# Altium PCB granite.PcbDoc
Units mm, origin at the board's own origin, x right, y up, seen from the top; angles counter-clockwise.
Board outline 40 x 40 mm, 2 copper layers (Top Layer, Bottom Layer), stack 1.271 mm thick; 53 components, 35 nets, 188 pads, 99 vias.
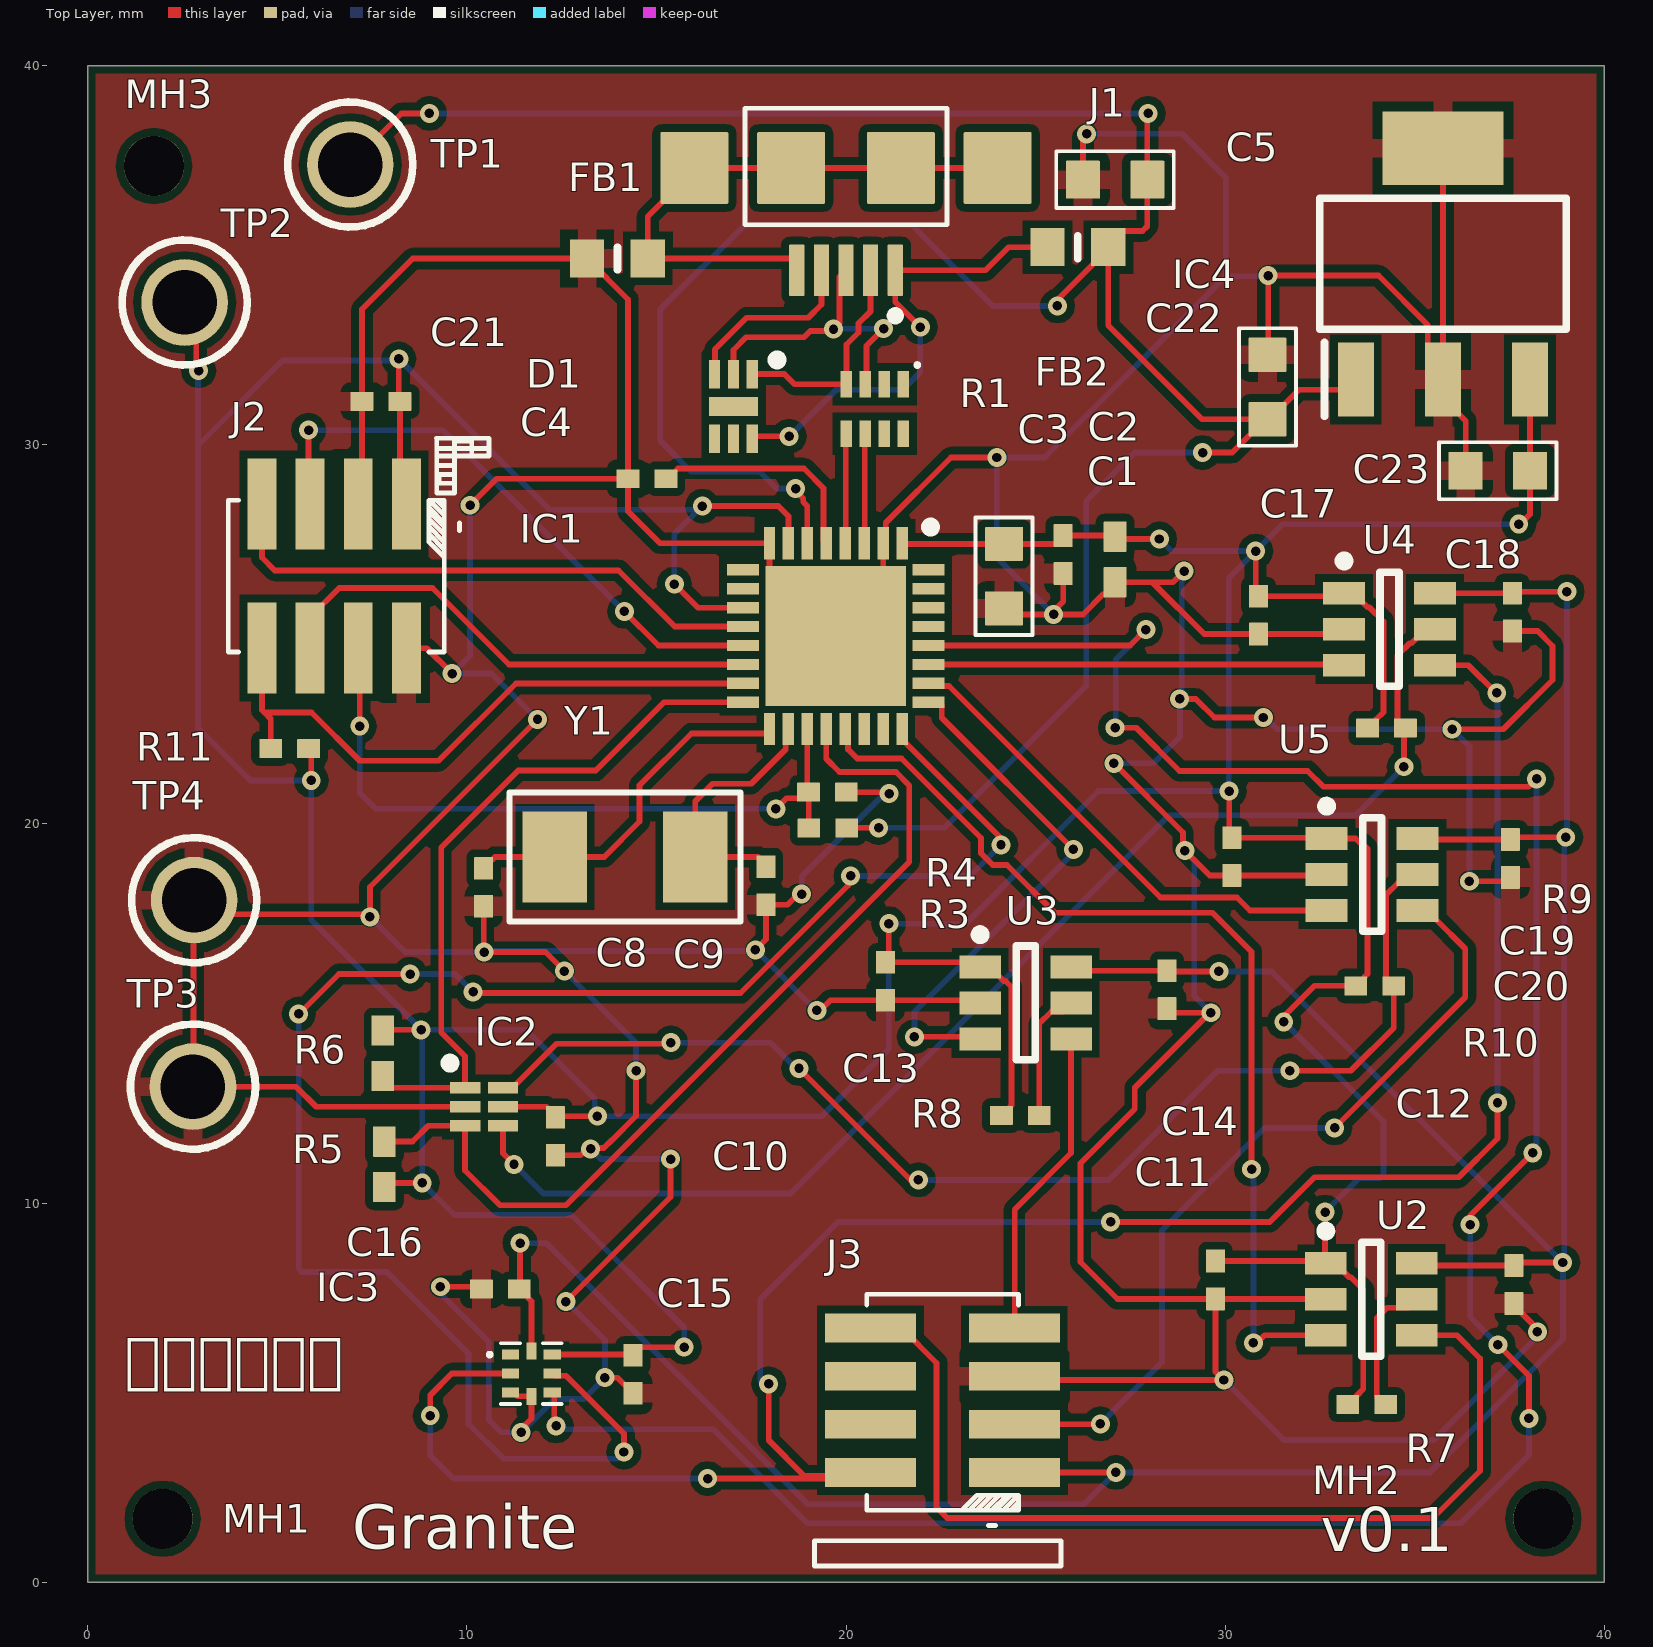
[diagram p0: Top Layer view]
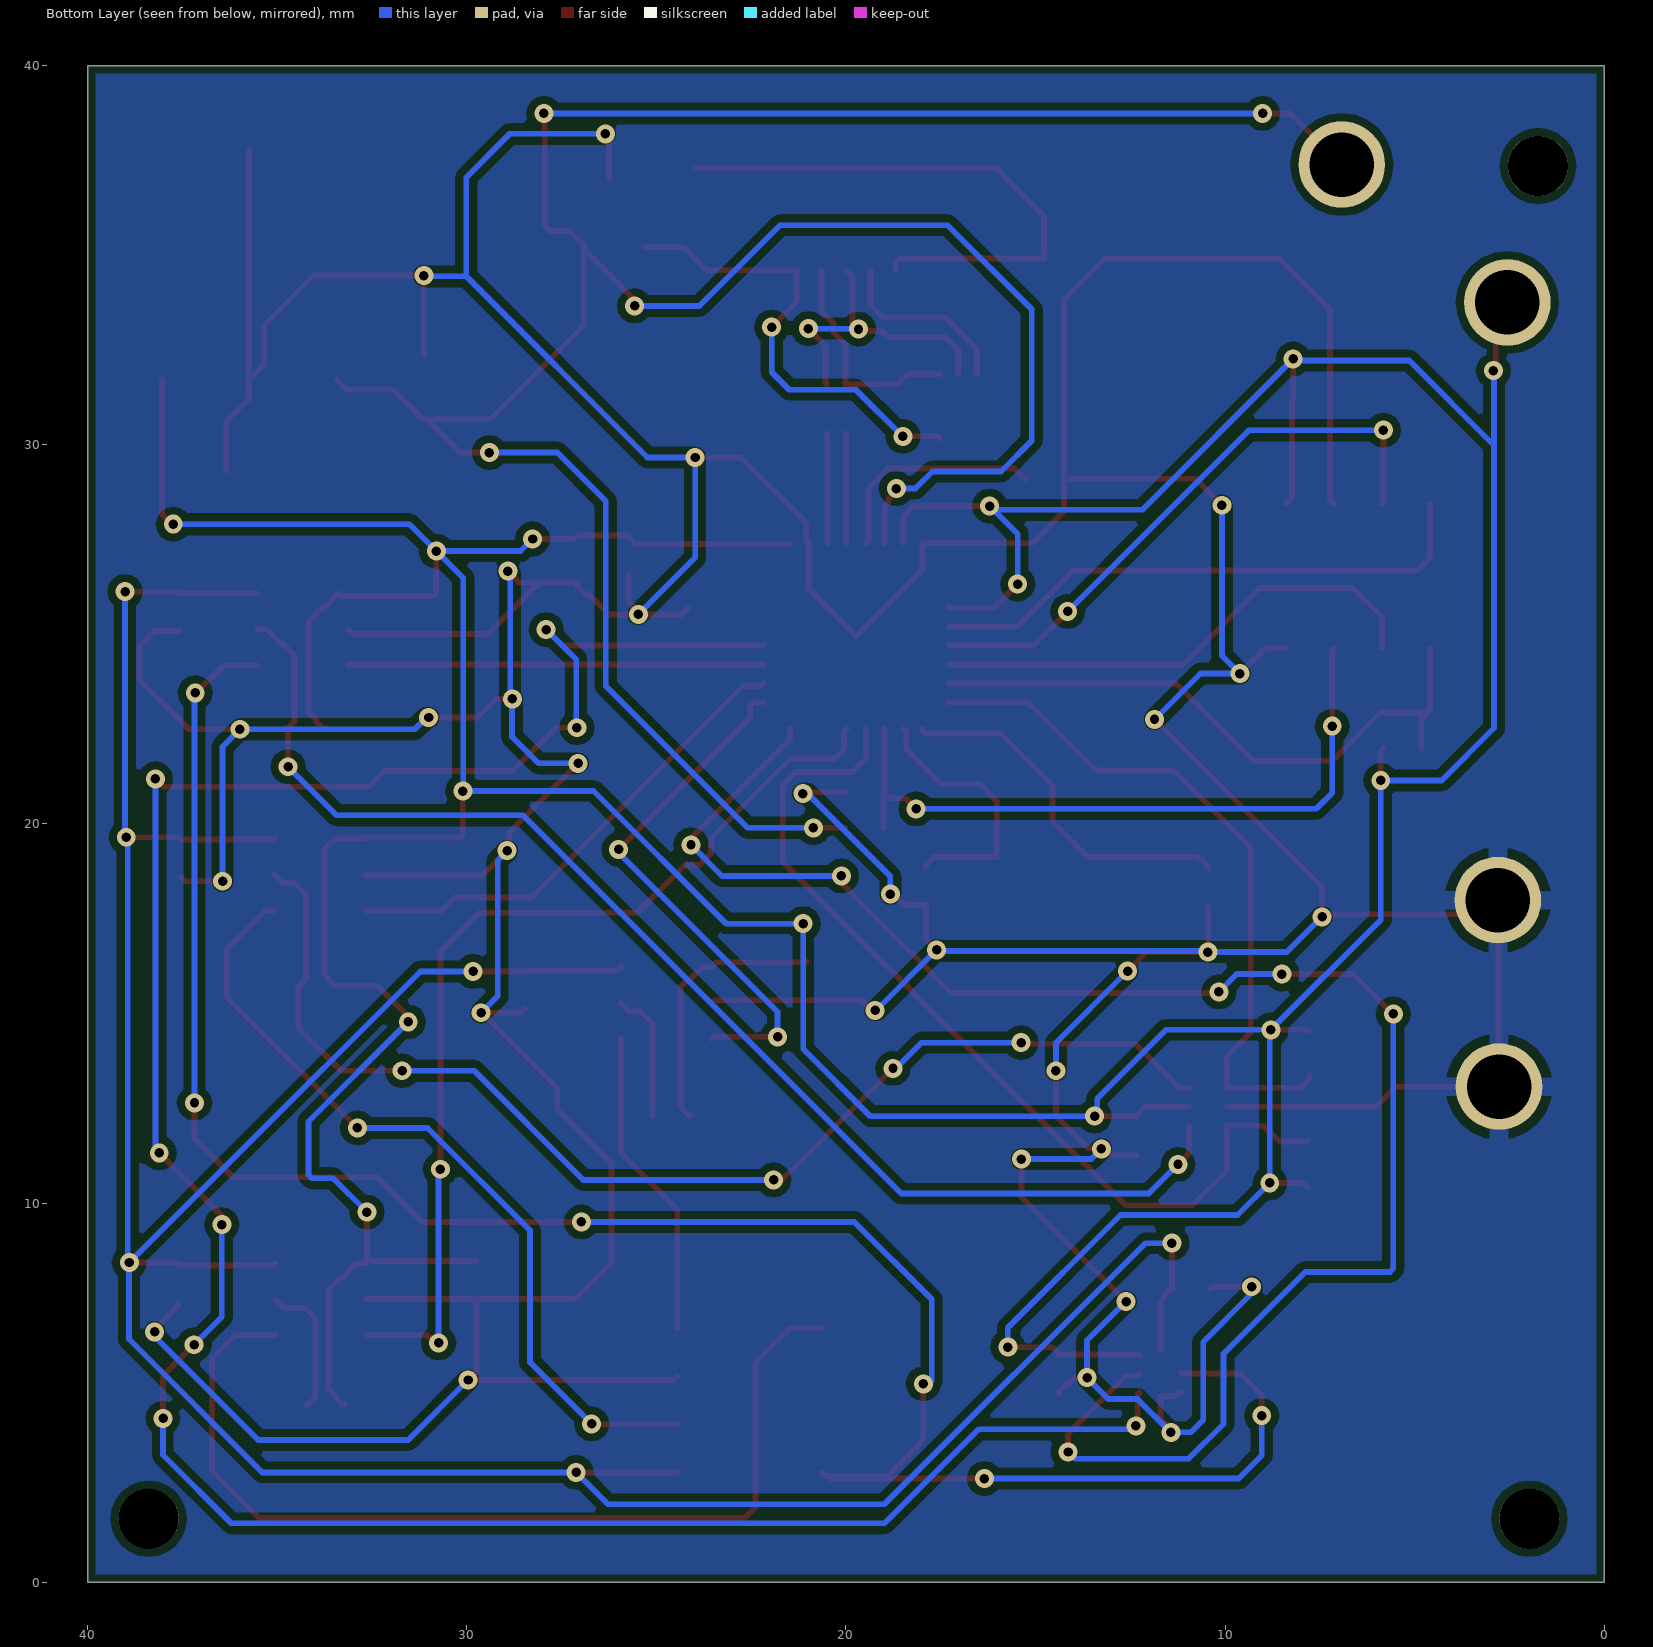
[diagram p1: Bottom Layer view, seen from below]

## Layer stack, top to bottom
Top Solder: solder mask 0.0102, Solder Resist, Dk 3.5
Top Layer: signal copper 0.0356
Dielectric 1: dielectric 1.2, FR-4, Dk 4.8
Bottom Layer: signal copper 0.0356
Bottom Solder: solder mask 0.0102, Solder Resist, Dk 3.5

## Board outline
0,40 40,40 40,0 0,0

## Design rules (kind name [scope] priority, off if disabled: settings)
BoardOutlineClearance [All] p1: gap=0.2 ignorepadtopadclearanceinfootprint=FALSE except(0.4: Arc-SplitBarrior Arc-SplitContinuation Track-SplitBarrior Track-SplitContinuation SMDPad-SplitBarrior SMDPad-SplitContinuation THPad-SplitBarrior THPad-SplitContinuation Via-SplitBarrior Via-SplitContinuation Fill-SplitBarrior Fill-SplitContinuation Poly-SplitBarrior Poly-SplitContinuation Region-SplitBarrior Region-SplitContinuation Text-SplitBarrior Text-SplitContinuation)
Clearance "Clearance Bottom Layer" [OnLayer('Bottom Layer')] p1: gap=0.203 ignorepadtopadclearanceinfootprint=TRUE except(0.254: Arc-Text Track-Text SMDPad-Text THPad-Text Via-Text Fill-Text Poly-Text Region-Text Text-Text)
Clearance "Clearance Top Layer" [OnLayer('Top Layer')] p2: gap=0.203 ignorepadtopadclearanceinfootprint=TRUE except(0.254: Arc-Text Track-Text SMDPad-Text THPad-Text Via-Text Fill-Text Poly-Text Region-Text Text-Text)
Clearance [All] p3: gap=0.2 ignorepadtopadclearanceinfootprint=FALSE except(0.089: Arc-Arc Arc-Track Arc-SMDPad Track-Track Track-SMDPad SMDPad-SMDPad; 0.127: Arc-Via Track-Via SMDPad-Via THPad-Via Via-Via; 0.254: Arc-Text Track-Text SMDPad-Text THPad-Text Via-Text Fill-Text Poly-Text Region-Text Text-Text)
HoleSize [All] p1: absolutevalues=TRUE maxlimit=6.3 minlimit=0.2 maxpercent=80.000 minpercent=20.000
MinimumAnnularRing [All] p1: minimumring=0.076
MinimumSolderMaskSliver [All] p1: minsoldermaskwidth=0.021
PolygonConnect PolygonConnect_1 [All] p1: thpad.connectstyle=Relief thpad.reliefconductorwidth=0.508 thpad.reliefentries=4 thpad.polygonreliefangle="90 Angle" thpad.airgapwidth=0.254 smdpad.connectstyle=Relief smdpad.reliefconductorwidth=0.508 smdpad.reliefentries=4 smdpad.polygonreliefangle="90 Angle" smdpad.airgapwidth=0.254 via.connectstyle=Direct via.reliefconductorwidth=0.508 via.reliefentries=4 via.polygonreliefangle="90 Angle" via.airgapwidth=0.254
RoutingCorners [All] p1: cornerstyle=Round minsetback=2.54 maxsetback=2.54
RoutingVias [All] p1: holewidth=0.25 width=0.5 viastyle="Through Hole" minholewidth=0.2 minwidth=0.45 maxholewidth=1 maxwidth=2
SilkToSilkClearance [All] p1: silktosilkclearance=0.1
SilkToSolderMaskClearance [IsPad] p1: minsilkscreentomaskgap=0.1 clearancetoexposedcopper=TRUE
SolderMaskExpansion [All] p1: expansion=0.102 istentingtop=FALSE
Width [All] p1: maxlimit=2.54 minlimit=0.089 preferedwidth=0.152 minimp=50.000000 maximp=50.000000 favimp=50.000000
25 further rules are at their usual default settings.

## Components (designator, comment, footprint, x,y, rotation, side; value= is the part's Value field where it differs from the comment)
C1 "C105-0402-X5R-16V0-20%" C1005L 25.73,27.11 r90 top value=1.0uF
C2 "C104_0402_X7R_16V0_10%_Kemet" C1005N 27.1,26.98 r90 top value=0.10uF
C3 "C106-0603-X5R-6.3V_+/-20%_Taiyo Yuden" C1608N 24.17,26.54 r90 top value=10uF
C4 "2.2uF" C1005L 14.75,29.11 r0 top
C5 "C106-0603-X5R-6.3V_+/-20%_Taiyo Yuden" C1608N 27.1,37 r0 top value=10uF
C8 "8pF" C1005L 10.44,18.33 r90 top
C9 "8pF" C1005L 17.89,18.37 r90 top
C10 "C104_0402_X7R_25V0_10%_Murata" C1005L 12.33,11.76 r90 top value=0.1uF
C11 "C104-0402-X7R-16V0-10%" C1005L 29.75,7.97 r90 top value=0.10uF
C12 "C104-0402-X7R-16V0-10%" C1005L 37.62,7.85 r90 top value=0.10uF
C13 "C104-0402-X7R-16V0-10%" C1005L 21.04,15.85 r90 top value=0.10uF
C14 "C104-0402-X7R-16V0-10%" C1005L 28.47,15.63 r90 top value=0.10uF
C15 "C104-0402-X7R-16V0-10%" C1005L 14.38,5.48 r90 top value=0.10uF
C16 "C104-0402-X7R-16V0-10%" C1005L 10.88,7.73 r0 top value=0.10uF
C17 "C104-0402-X7R-16V0-10%" C1005L 30.88,25.51 r90 top value=0.10uF
C18 "C104-0402-X7R-16V0-10%" C1005L 37.58,25.59 r90 top value=0.10uF
C19 "C104-0402-X7R-16V0-10%" C1005L 30.18,19.14 r90 top value=0.10uF
C20 "C104-0402-X7R-16V0-10%" C1005L 37.53,19.09 r90 top value=0.10uF
C21 "C104_0402_X7R_16V0_10%_Kemet" C1005L 7.73,31.15 r0 top value=0.10uF
C22 "C106-0603-X5R-6.3V_+/-20%_Taiyo Yuden" C1608N 31.12,31.53 r270 top value=10uF
C23 "C106-0603-X5R-6.3V_+/-20%_Taiyo Yuden" C1608N 37.2,29.32 r0 top value=10uF
D1 "RCLAMP0854P.TCT" SON50P160X160X65-7N 17.03,31.02 r270 top
FB1 "MPZ1608S331A" BEADC1608X95N 13.97,34.92 r180 top
FB2 "MPZ1608S331A" BEADC1608X95N 26.12,35.22 r0 top
IC1 "MK20DX128VFM5" QFN50P500X500X100-33N-D 19.73,24.96 r270 top
IC2 "NLX2G14AMUTCG" SON50P100X145X55-6N 10.45,12.54 r0 top
IC3 "74LVC2T45GM,125" 74AUP2G08GM125 11.7,5.5 r0 top
IC4 "MCP1825S-3302E_DB" SOT230P700X180-4N 35.75,34.78 r90 top
J1 "MICRO_USB_AB" "CONN USB_MIcro_AB" 20,37.41 r270 top locked
J2 "HEADER 4x2 50mil FCI" "4x2 50mil header_FCI" 8.4,26.54 r180 top
J3 "HEADER 4x2 50mil FCI" "4x2 50mil header_FCI" 22.55,2.89 r90 top
MH1 "62.5mil" MTHOLE62.5mil 1.97,1.67 r0 top value="Mounting Hole"
MH2 "62.5mil" MTHOLE62.5mil 38.4,1.67 r90 top value="Mounting Hole"
MH3 "62.5mil" MTHOLE62.5mil 1.74,37.36 r90 top value="Mounting Hole"
R1 "R330_ARRAY_X4_0804_5%_Pan" CAC-50P200X100-8N 20.76,30.95 r270 top value=33
R3 "R472-0402-1%" C1005L 19.52,19.89 r0 top value=4.70K
R4 "R103-0402-5%_Yageo" C1005L 19.51,20.84 r180 top value=10k
R5 "R103-0402-5%_Yageo" C1005N 7.82,11.02 r270 top value=10k
R6 "R103-0402-5%_Yageo" C1005N 7.78,13.95 r90 top value=10k
R7 "R472-0402-1%" C1005L 33.74,4.68 r180 top value=4.70K
R8 "R472-0402-1%" C1005L 24.6,12.31 r180 top value=4.70K
R9 "R472-0402-1%" C1005L 34.26,22.53 r180 top value=4.70K
R10 "R472-0402-1%" C1005L 33.95,15.73 r180 top value=4.70K
R11 "R103-0402-5%_Yageo" C1005L 5.32,21.99 r0 top value=10k
TP1 "TH_TP_67mil_RED" TH_TP_67MIL_RED 6.92,37.4 r0 top
TP2 "TH_TP_67mil_RED" TH_TP_67MIL_RED 2.55,33.76 r0 top
TP3 "TH_TP_67mil_RED" TH_TP_67MIL_RED 2.77,13.07 r0 top
TP4 "TH_TP_67mil_RED" TH_TP_67MIL_RED 2.8,17.99 r0 top
U2 "74LVC1T45W6" SOT23-6_SOT95P280X145-6N 33.86,7.46 r0 top
U3 "74LVC1T45W6" SOT23-6_SOT95P280X145-6N 24.74,15.28 r0 top
U4 "74LVC1T45W6" SOT23-6_SOT95P280X145-6N 34.34,25.14 r0 top
U5 "74LVC1T45W6" SOT23-6_SOT95P280X145-6N 33.88,18.67 r0 top
Y1 "8.0MHz" XTAL_2-SMD_TXC 14.17,19.13 r0 top

## Footprints (in the part's own frame and the unit in brackets; to place one, negate y for a bottom-side part, rotate by r counter-clockwise, add the part's x,y. Pads: shape width x height; smd on the part's side, far side on the other; paste and mask are expansions set on the pad)
"4x2 50mil header_FCI" [mm]
  rect 0.76x2.4 smd: 1(0,-1.9) 2(0,1.9) 3(1.27,-1.9) 4(1.27,1.9) 5(2.54,-1.9) 6(2.54,1.9) 7(3.81,-1.9) 8(3.81,1.9)
  silkscreen extent -1.4,-2 4.7,2
74AUP2G08GM125 [mm]
  rect 0.45x0.27 smd: 1(-0.55,0.5) 2(-0.55,0) 3(-0.55,-0.5) 5(0.55,-0.5) 6(0.55,0) 7(0.55,0.5)
  rect 0.27x0.45 smd: 4(0,-0.6) 8(0,0.6)
  silkscreen extent -1.15,-0.8 0.8,0.8, body extent -0.8,-0.8 0.8,0.8, height 0.6
BEADC1608X95N [mm]
  rect 0.9x1 smd: 1(-0.8,0) 2(0.8,0)
  silkscreen extent 0,-0.3 0,0.3, body extent -0.8,-0.4 0.8,0.4, height 0.95
C1005L [mm] "Chip, Body 1.0x0.5mm, IPC High Density"
  rrect5% 0.6x0.5 smd mask+0.051: 1(-0.5,0) 2(0.5,0)
  body extent -0.55,-0.3 0.55,0.3, height 0.6
C1005N [mm] "Chip, Body 1.0x0.5mm, IPC Medium Density"
  rrect5% 0.8x0.6 smd mask+0.051: 1(-0.6,0) 2(0.6,0)
  body extent -0.55,-0.3 0.55,0.3, height 0.6
C1608N [mm] "Chip Body 1.6x0.8mm, IPC Medium Density"
  rrect5% 0.9x1 smd mask+0.05: 1(-0.85,0) 2(0.85,0)
  silkscreen extent -1.55,-0.75 1.55,0.75, body extent -0.85,-0.48 0.85,0.48, height 0.6
CAC-50P200X100-8N [mm] "Chip Array, Concave, 8-Leads, Pitch 0.50mm,  Body 2.00x1.00mm,  IPC Medium Density"
  rect 0.7x0.3 smd: 1(-0.65,0.75) 2(-0.65,0.25) 3(-0.65,-0.25) 4(-0.65,-0.75) 5(0.65,-0.75) 6(0.65,-0.25) 7(0.65,0.25) 8(0.65,0.75)
  silkscreen extent -1.21,1.07 -1.11,1.17, body extent -0.55,-1 0.55,1, height 0.45
"CONN USB_MIcro_AB" [mm] "Micro AB - Standard (Bottom mount), Shell SMT"
  rrect5% 1.35x0.4 smd mask+0.051: 1(2.8,1.3) 2(2.8,0.65) 3(2.8,0) 4(2.8,-0.65) 5(2.8,-1.3)
  rrect5% 1.9x1.8 smd mask+0.051: 6(0.1,-4) 7(0.1,4) 8(0.1,1.45) 9(0.1,-1.45)
  silkscreen extent -1.47,-2.67 4.1,2.67, body extent -2.58,-4.4 3.05,4.4, height 2.84
MTHOLE62.5mil [mil] "Mounting Hole - 62.5mil"
  round 62.5 hole 62.5 unplated: 1(0,0)
QFN50P500X500X100-33N-D [mm]
  rect 0.85x0.3 smd: 1(-2.45,1.75) 2(-2.45,1.25) 3(-2.45,0.75) 4(-2.45,0.25) 5(-2.45,-0.25) 6(-2.45,-0.75) 7(-2.45,-1.25) 8(-2.45,-1.75) 17(2.45,-1.75) 18(2.45,-1.25) 19(2.45,-0.75) 20(2.45,-0.25) 21(2.45,0.25) 22(2.45,0.75) 23(2.45,1.25) 24(2.45,1.75)
  rect 0.3x0.85 smd: 9(-1.75,-2.45) 10(-1.25,-2.45) 11(-0.75,-2.45) 12(-0.25,-2.45) 13(0.25,-2.45) 14(0.75,-2.45) 15(1.25,-2.45) 16(1.75,-2.45) 25(1.75,2.45) 26(1.25,2.45) 27(0.75,2.45) 28(0.25,2.45) 29(-0.25,2.45) 30(-0.75,2.45) 31(-1.25,2.45) 32(-1.75,2.45)
  rect 3.7x3.7 smd: 33(0,0)
  silkscreen extent -3,2.38 -2.75,2.63, body extent -2.55,-2.55 2.55,2.55, height 1
SON50P100X145X55-6N [mm]
  rect 0.8x0.3 smd: 1(-0.5,0.5) 2(-0.5,0) 3(-0.5,-0.5) 4(0.5,-0.5) 5(0.5,0) 6(0.5,0.5)
  silkscreen extent -1.02,1.03 -0.77,1.27, body extent -0.55,-0.72 0.55,0.72, height 0.55
SON50P160X160X65-7N [mm]
  rect 0.75x0.3 smd: 1(-0.85,0.5) 2(-0.85,0) 3(-0.85,-0.5) 4(0.85,-0.5) 5(0.85,0) 6(0.85,0.5)
  rect 0.5x1.3 smd: 7(0,0)
  silkscreen extent -1.35,1.03 -1.1,1.28, body extent -0.85,-0.8 0.85,0.8, height 0.65
SOT23-6_SOT95P280X145-6N [mm] "SOT23, 6-Leads, Body 3.0x3.0mm (max), Pitch 0.95mm, IPC Medium Density"
  rect 1.1x0.6 smd: 1(-1.2,0.95) 2(-1.2,0) 3(-1.2,-0.95) 4(1.2,-0.95) 5(1.2,0) 6(1.2,0.95)
  silkscreen extent -1.32,-1.5 0.25,1.92, body extent -0.87,-1.5 0.87,1.5, height 1.45
SOT230P700X180-4N [mm]
  rect 1.95x0.95 smd: 1(-3.05,2.3) 2(-3.05,0) 3(-3.05,-2.3)
  rect 1.95x3.2 smd: 4(3.05,0)
  silkscreen extent -4.03,-3.25 1.73,3.25, body extent -3.5,-3.25 3.5,3.25, height 1.8
TH_TP_67MIL_RED [mil] "Keystone Through-Hole Multipurpose-Test Point"
  round 90 hole 67: 1(0,0)
  silkscreen extent -65,-65 65,65, body extent -50,-51 50,49, height 180
XTAL_2-SMD_TXC [mm] "Surface Mount 2-SMD"
  rect 1.7x2.4 smd: 1(-1.85,0) 2(1.85,0)
  silkscreen extent -3.05,-1.7 3.05,1.7, body extent -2.6,-1.6 2.6,1.6, height 1.35

## Part data
C1: "1.0uF, 0402, 16V0, 20%, X5R", Manufacturer 1="Taiyo Yuden", Manufacturer Part Number 1=TMK105BJ105MV-F, Supplier Part Number 1=587-3245-1-ND, Supplier 1=Digi-Key
C2 C21: "CAP CER 0.1UF 16V 10% X7R 0402", Manufacturer 1=Kemet, Manufacturer Part Number 1=C0402C104K4RACTU, Supplier Part Number 1=399-3521-1-ND, Supplier 1=Digi-Key
C3 C5 C22 C23: "CAP CER 10UF 6.3V X5R 0603", Manufacturer 1="Taiyo Yuden", Manufacturer Part Number 1=JMK107ABJ106MA-T, Supplier Part Number 1=587-5869-1-ND, Supplier 1=Digi-Key
C4: library part CC0402MRX5R6BB225, "CAP CER 2.2UF 10V X5R 0402", Case Code (Imperial)=0402, Case Code (Metric)=1005, Dielectric=X5R, Manufacturer=Yageo, Max Operating Temperature=85°C, Min Operating Temperature=-55°C, Package Quantity=5000, Supplier Part Number 1=311-1733-1-ND, Tolerance=20%, Voltage Rating=10V, Capacitance=2.2uF, Case/Package=0402, Category="Ceramic Capacitors", ComponentLink1Description=http://www.mouser.com/ds/2/447/Yageo_UPY-GP_NP0_16V-to-50V_9-358835.pdf?src-supplier=Mouser, ComponentLink1URL=http://www.mouser.com/ds/2/447/Yageo_UPY-GP_NP0_16V-to-50V_9-358835.pdf?src-supplier=Mouser, ComponentLink2Description=http://www.yageo.com/exep/pages/download/literatures/ProductSelectionGuide%202014_Final_2.pdf?src-supplier=Digi-Key, ComponentLink2URL=http://www.yageo.com/exep/pages/download/literatures/ProductSelectionGuide%202014_Final_2.pdf?src-supplier=Digi-Key, ComponentLink3Description=http://www.yageo.com/documents/recent/UPY-GPHC_X5R_4V-to-50V_25.pdf?src-supplier=Digi-Key, ComponentLink3URL=http://www.yageo.com/documents/recent/UPY-GPHC_X5R_4V-to-50V_25.pdf?src-supplier=Digi-Key, Halogen Free="Halogen Free", Lead Free="Lead Free", Length=0.039inch, Manufacturer Part Number=CC0402MRX5R6BB225, Mount="Surface Mount", Packaging="Tape and Reel", Pricing 1="1=0.11000, 10=0.07800, 50=0.04260, 100=0.03470, 500=0.02480, 1000=0.01948, 2500=0.01771, 5000=0.01629 (USD)", RoHS=Yes, Stock 1=48880, Supplier 1=Digi-Key, Termination=SMD/SMT, Thickness=0.022inch, Voltage Rating (DC)=10V, Weight=2.3E-05oz, Width=0.02inch
C8 C9: library part CC0402DRNPO9BN8R0, "CAPACITOR CERAMIC 8PF 50V, C0G/NP0, 0.5pF, 0402", Case Code (Imperial)=0402, Case Code (Metric)=1005, Dielectric=C0G, Insulation Resistance=10GR, Manufacturer=Yageo, Max Operating Temperature=125°C, Min Operating Temperature=-55°C, Supplier Part Number 1=311-1639-1-ND, Voltage Rating=50V, Capacitance=8pF, Case/Package=0402, Category="Ceramic Capacitors", ComponentLink1Description=https://datasheet.ciiva.com/13211/upy-gp-np0-16v-to-50v-8-13211222.pdf?src-supplier=Mouser, ComponentLink1URL=https://datasheet.ciiva.com/13211/upy-gp-np0-16v-to-50v-8-13211222.pdf?src-supplier=Mouser, Composition=Ceramic, Depth=0.5mm, Lead Free="Lead Free", Length=1mm, Manufacturer Part Number=CC0402DRNPO9BN8R0, Mount="Surface Mount", Number of Pins=2, Packaging="Tape and Reel", Pricing 1="1=0.10000, 10=0.03200, 100=0.01410, 500=0.01004, 1000=0.00790, 2500=0.00718, 5000=0.00660 (USD)", Pricing 2="1=0.10000, 10=0.02000, 100=0.00900, 1000=0.00700, 2500=0.00500, 10000=0.00500 (USD)", RoHS=Yes, Stock 1=97356, Stock 2=49855, Supplier 1=Digi-Key, Supplier 2=Mouser, Supplier Part Number 2=603-CC402DRNPO9BN8R0, Termination=SMD/SMT, Thickness=0.022inch, Voltage Rating (DC)=50V, Width=0.02inch
C10: "CAP CER 0.1UF 10V 10% X7R 0402", Manufacturer 1="Murata Electronics North America", Manufacturer Part Number 1=GRM155R71A104KA01D, Supplier Part Number 1=490-6321-1-ND, Supplier 1=Digi-Key, Supplier 2=Digi-Key, Supplier Part Number 2=490-6321-2-ND
C11 C12 C13 C14 C15 C16 C17 C18 C19 C20: "CAP CER 0.1UF 16V X7R 0402", Capacitance=100nF, Case Code (Imperial)=0402, Case Code (Metric)=1005, Dielectric=X7R, Manufacturer=Samsung, Manufacturer Part Number 1=CL05B104KO5NNNC, Max Operating Temperature=125°C, Min Operating Temperature=-55°C, Package Quantity=1, Supplier Part Number 1=1276-1001-1-ND, Temperature Stability=+/-15%, Tolerance=10%, Voltage=16V, Case/Package=0402, Category="Ceramic Capacitors", ComponentLink1Description=https://datasheet.ciiva.com/26920/getdatasheetpartid-359683-26920169.pdf?src-supplier=Verical, ComponentLink1URL=https://datasheet.ciiva.com/26920/getdatasheetpartid-359683-26920169.pdf?src-supplier=Verical, ComponentLink2Description=https://datasheet.ciiva.com/29198/458718-da-01-en-vs-kondensator-0402-29198423.pdf?src-supplier=Conrad, ComponentLink2URL=https://datasheet.ciiva.com/29198/458718-da-01-en-vs-kondensator-0402-29198423.pdf?src-supplier=Conrad, ComponentLink3Description=https://datasheet.ciiva.com/16208/cl05b104kq5nnnc-16208343.pdf?src-supplier=Future+Electronics, ComponentLink3URL=https://datasheet.ciiva.com/16208/cl05b104kq5nnnc-16208343.pdf?src-supplier=Future+Electronics, ComponentLink4Description=https://datasheet.ciiva.com/26309/mlcc-catalogdownload2013-eng-26309003.pdf?src-supplier=Distrelec, ComponentLink4URL=https://datasheet.ciiva.com/26309/mlcc-catalogdownload2013-eng-26309003.pdf?src-supplier=Distrelec, Contact Plating=Tin, Depth=0.5mm, Height=0.5mm, Lead Free="Lead Free", Length=1mm, Material=Ceramic, Mount="Surface Mount", Packaging="Tape and Reel", Pricing 1="1=0.10000, 10=0.02900, 100=0.01290, 500=0.00924, 1000=0.00726, 2500=0.00660, 5000=0.00607 (USD)", Pricing 2="1=0.00960, 500=0.00700, 1500=0.00660, 2500=0.00640, 5000=0.00620 (USD)", Radiation Hardening=No, RoHS=Yes, Size=0402, Stock 1=24330664, Stock 2=30484639, Supplier 1=Digi-Key, Supplier 2="Future Electronics", Supplier Part Number 2=CL05B104KO5NNNC-CUTT, Thickness=0.022inch, Voltage Rating=16V, Voltage Rating (DC)=16V, Width=0.02inch
D1: "TVS Diode (Bi-directional)", Manufacturer_Name=SEMTECH, Mouser Part Number=947-RCLAMP0854P.TCT, Arrow Part Number=RCLAMP0854P.TCT, Arrow Price/Stock=https://www.arrow.com/en/products/rclamp0854p.tct/semtech, Datasheet Link=https://www.semtech.com/uploads/documents/rclamp0854p.pdf, Height=0.65mm, Manufacturer_Part_Number=RCLAMP0854P.TCT, Mouser Price/Stock=https://www.mouser.co.uk/ProductDetail/Semtech/RCLAMP0854PTCT?qs=rBWM4%252BvDhIclAOYs1MksDA%3D%3D
FB1 FB2: "Ferrite Bead", Manufacturer_Name=TDK, Mouser Part Number=810-MPZ1608S331A, Arrow Part Number=MPZ1608S331A, Arrow Price/Stock=https://www.arrow.com/en/products/mpz1608s331a/tdk, Datasheet Link=https://www.mouser.com/datasheet/2/400/eads_commercial_power_mpz1608_en-923650.pdf, Height=0.95mm, Manufacturer_Part_Number=MPZ1608S331A, Mouser Price/Stock=https://www.mouser.co.uk/ProductDetail/TDK/MPZ1608S331A?qs=0D2o47UmnR9mzpsecXlyzQ%3D%3D
IC1: "NXP - MK20DX128VFM5 - MCU, 32BIT, CORTEX-M4, 50MHZ, QFN-32", Case/Package=QFN, Frequency=50MHz, Manufacturer="NXP Freescale", Manufacturer Name=NXP, Max Operating Temperature=105°C, Max Supply Voltage=3.6V, Min Operating Temperature=-40°C, Min Supply Voltage=1.71V, Mouser Part Number=841-MK20DX128VFM5, Package Quantity=490, Supplier Part Number 1=MK20DX128VFM5-ND, Arrow Part Number=MK20DX128VFM5, Arrow Price/Stock=https://www.arrow.com/en/products/mk20dx128vfm5/nxp-semiconductors, Category=Microcontrollers, ComponentLink1Description=https://datasheet.ciiva.com/6654/k20p32m50sf0-6654512.pdf?src-supplier=Digi-Key, ComponentLink1URL=https://datasheet.ciiva.com/6654/k20p32m50sf0-6654512.pdf?src-supplier=Digi-Key, ComponentLink2Description=https://datasheet.ciiva.com/41452/001183410-da-01-en-ic-arm-cortex-m-mk20dx128vfm5-qfn-32-fre-41452897.pdf?src-supplier=Conrad, ComponentLink2URL=https://datasheet.ciiva.com/41452/001183410-da-01-en-ic-arm-cortex-m-mk20dx128vfm5-qfn-32-fre-41452897.pdf?src-supplier=Conrad, ComponentLink3Description=https://datasheet.ciiva.com/9232/k20p32m50sf0-9232714.pdf?src-supplier=Avnet, ComponentLink3URL=https://datasheet.ciiva.com/9232/k20p32m50sf0-9232714.pdf?src-supplier=Avnet, ComponentLink4Description=https://datasheet.ciiva.com/16366/mk20dx128vfm5-16366586.pdf?src-supplier=Future+Electronics, ComponentLink4URL=https://datasheet.ciiva.com/16366/mk20dx128vfm5-16366586.pdf?src-supplier=Future+Electronics, ComponentLink5Description=https://datasheet.ciiva.com/7780/1605598-7780206.pdf?src-supplier=Element14, ComponentLink5URL=https://datasheet.ciiva.com/7780/1605598-7780206.pdf?src-supplier=Element14, Core Architecture=ARM, Data Bus Width=32b, Datasheet Link=http://www.nxp.com/docs/en/data-sheet/K20P32M50SF0.pdf, Halogen Free="Halogen Free", Height=1mm, Interface=I2C,SPI,USB,IrDA,UART,USART,CAN,I2S, Lead Free="Lead Free", Length=5mm, Manufacturer Part Number=MK20DX128VFM5, Manufacturer Part Number 1=MK20DX128VFM5, Max Frequency=50MHz, Memory Size=128KB, Memory Type=FLASH, Mount="Surface Mount", Mouser Price/Stock=https://www.mouser.co.uk/ProductDetail/NXP-Semiconductors/MK20DX128VFM5?qs=b%252B6ZnhyoAL%252B%2FGUAqk82Hrg%3D%3D, Number of ADC Channels=1, Number of I/Os=20, Number of I2C Channels=1, Number of Pins=32, Number of Programmable I/O=20, Number of SPI Channels=1, Number of Timers/Counters=14, Number of UART Channels=2, Number of USB Channels=1, Oscillator Type=Internal, Packaging=Tray, Peripherals=POR,PWM,WDT,DMA,LVD,I2C, Pricing 1="1=6.14000, 10=5.51700, 25=5.21560, 100=4.52010, 250=4.28832, 500=3.84788, 1000=3.24520, 2500=3.08294, 5000=2.96704 (USD)", Radiation Hardening=No, RAM Size=16KB, REACH SVHC="No SVHC", RoHS=Yes, Stock 1=7204, Supplier 1=Digi-Key, Weight=0.002198oz, Width=5mm
IC2: "Integrated Circuit", Manufacturer_Name="ON Semiconductor", Mouser Part Number=863-NLX2G14AMUTCG, Arrow Part Number=NLX2G14AMUTCG, Arrow Price/Stock=https://www.arrow.com/en/products/nlx2g14amutcg/on-semiconductor, Datasheet Link=http://www.onsemi.com/pub/Collateral/NLX2G14-D.PDF, Height=0.55mm, Manufacturer_Part_Number=NLX2G14AMUTCG, Mouser Price/Stock=https://www.mouser.co.uk/ProductDetail/ON-Semiconductor/NLX2G14AMUTCG?qs=k6dkFvHqcvDOIgYtx3wHeg%3D%3D
IC3: "Integrated Circuit", Manufacturer_Name=Nexperia, Mouser Part Number=771-74LVC2T45GM125, Arrow Part Number=74LVC2T45GM,125, Arrow Price/Stock=https://www.arrow.com/en/products/74lvc2t45gm125/nexperia, Datasheet Link=https://assets.nexperia.com/documents/data-sheet/74LVC_LVCH2T45.pdf, Height=0.5mm, Manufacturer_Part_Number=74LVC2T45GM,125, Mouser Price/Stock=https://www.mouser.co.uk/ProductDetail/Nexperia/74LVC2T45GM125?qs=jquClx72t9D6MUd%252BURVS1Q%3D%3D
IC4: "Integrated Circuit", Manufacturer Part Number 1=MCP1825S-3302E/DB, Manufacturer_Name=Microchip, Mouser Part Number=579-MCP1825S-3302EDB, RS Part Number=6695092P, Allied Price/Stock=http://www.alliedelec.com/microchip-technology-inc-mcp1825s-3302e-db/70046538/, Allied_Number=70046538, Datasheet Link=http://docs-emea.rs-online.com/webdocs/137e/0900766b8137ed40.pdf, Height=1.8mm, Mouser Price/Stock=https://www.mouser.co.uk/ProductDetail/Microchip-Technology/MCP1825S-3302E-DB?qs=gsqZ4L1luKoZerS%252BYohoGg%3D%3D, RS Price/Stock=http://uk.rs-online.com/web/p/products/6695092P
J1: library part CONN_MICRO_USB_AB_10104111-0001LF_FCI, "USB - micro AB USB 2.0 Receptacle Connector 5 Position Surface Mount, Right Angle, Horizontal", Manufacturer 1="Amphenol FCI", Manufacturer Part Number 1=10104111-0001LF, Supplier Part Number 1=609-4053-1-ND, Supplier 1=Digikey
J2 J3: "CONN HEADER 8POS DL UNSHRD SMD", Manufacturer 1=FCI, Manufacturer Part Number 1=20021121-00008C4LF, Supplier Part Number 1=609-3694-1-ND, Supplier 1=Digi-key
MH1 MH2 MH3: library part MTHOLE62.5mil, PART NUMBER="NOT A PART", PART DESC="Mounting Hole, 1/16\", non-plated", PCB DECAL=MTHOLE125
R1: "RES ARRAY 4 RES 33 OHM 0804", Manufacturer 1="Panasonic Electronic Components", Manufacturer Part Number 1=EXB-N8V330JX, Supplier Part Number 1=Y10330CT-ND, Supplier 1=Digi-Key
R3 R7 R8 R9 R10: "RES 4.7K OHM 1/10W 1% 0402 SMD", Package/Size=0402, Power Rating=100mW, Supplier Part Number 1=P4.70KLCT-ND, Temperature Coefficient=+-100ppm/C, Tolerance=1%, Supplier 1=Digi-Key
R4 R5 R6 R11: "RES SMD 10K OHM 5% 1/16W 0402", Manufacturer 1=Yageo, Manufacturer Part Number 1=RC0402JR-0710KL, Supplier Part Number 1=311-10KJRCT-ND, Supplier 1=Digi-key
TP1 TP2 TP3 TP4: "TEST POINT PC MULTI PURPOSE RED", Munfacturer Part Number 1=36-5010-ND, Manuafcturer 1="Keystone Electronics", Supplier 1=Digi-Key, Supplier Part Number 1=36-5010-ND
U2 U3 U4 U5: library part 74LVC1T45W6-7, "74LVC Series 5.5 V 3-State SMT Single Bit Dual Supply Transceiver - SOT-26", Case/Package=SOT-23-6, High Level Output Current=-32mA, Low Level Output Current=32mA, Manufacturer=Diodes, Max Operating Temperature=125°C, Max Supply Voltage=5.5V, Min Operating Temperature=-40°C, Min Supply Voltage=1.65V, Operating Supply Current=4uA, Package Quantity=3000, Quiescent Current=3uA, Supplier Part Number 1=74LVC1T45W6-7DICT-ND, Category="Voltage Level Shifters", Channel Type=Bidirectional, ComponentLink1Description=http://www.mouser.com/ds/2/115/74LVC1T45-318124.pdf?src-supplier=Mouser, ComponentLink1URL=http://www.mouser.com/ds/2/115/74LVC1T45-318124.pdf?src-supplier=Mouser, ComponentLink2Description=http://www.diodes.com/datasheets/74LVC1T45.pdf?src-supplier=Avnet, ComponentLink2URL=http://www.diodes.com/datasheets/74LVC1T45.pdf?src-supplier=Avnet, ComponentLink3Description=https://www.diodes.com/assets/Datasheets/74LVC1T45.pdf?src-supplier=Digi-Key, ComponentLink3URL=https://www.diodes.com/assets/Datasheets/74LVC1T45.pdf?src-supplier=Digi-Key, Contact Plating=Tin,Matte, Logic Function=Translator, Manufacturer Part Number=74LVC1T45W6-7, Mount="Surface Mount", Number of Channels=1, Number of Circuits=1, Packaging="Tape and Reel", Pricing 1="1=0.36000, 10=0.27200, 25=0.23760, 100=0.15370, 250=0.12728, 500=0.10182, 1000=0.07806 (USD)", RoHS=Yes, Stock 1=23489, Supplier 1=Digi-Key
Y1: library part CRYSTAL_8MHZ_2-SMD_AA-8.000MALV-T_TXC, "8MHz ±30ppm Crystal 8pF 150 Ohm -40°C ~ 125°C AEC-Q200 Surface Mount 2-SMD", Manufacturer 1="TXC CORPORATION", Manufacturer Part Number 1=AA-8.000MALV-T, Supplier Part Number 1=887-1667-1-ND, Supplier 1=Digi-Key

## Via types
v1: diameter 0.5, hole 0.25, Top Layer to Bottom Layer, 99 vias

## Nets (pads, with @x,y where several pads share a name; then routed paths per layer and width w, separated by ;. In a path a pad name is that pad's centre, name@x,y a point inside that pad or via, vN(x,y) a via of type N, cw(c..) or ccw(c..) an arc to the next point about the centre after c; other vN are vias at no path point)
GND: C1.1 C2.1 C3.1 C4.1 C5.1 C8.1 C9.1 C10.1 C11.1 C12.1 C13.1 C14.1 C15.1 C16.1 C17.1 C18.1 C19.1 C20.1 C21.1 C22.1 C23.1 FB1.2 IC1.2 IC1.8 IC1.33 IC2.2 IC3.3 IC3.4 IC4.2 IC4.4 J2.2 J2.3 J3.5 R4.1 TP3.1 TP4.1 U2.2 U3.2 U4.2 U5.2 | length 249.8
  Top Layer w0.152: J2.3 7.23,28.54 C21.1 7.23,33.58 8.57,34.92 FB1.2 14.25,33.84 C4.1 ; J2.2 8.94,24.64 v1(9.61,23.97) ; v1(9.3,7.79) 10.32,7.79 C16.1 ; IC2.2 6.02,12.54 5.49,13.07 TP3.1 2.785,13.085 2.785,17.975 3.143,17.617 7.373,17.617 v1(7.44,17.55) 7.44,18.34 v1(11.86,22.76) ; v1(10.08,28.41) 10.78,29.11 C4.1 ; C8.1 10.44,16.63 v1(10.45,16.62) 12.07,16.62 v1(12.57,16.12) ; IC3.3 11.24,5 11.34,4.9 IC3.4 11.7,4.314 11.43,4.044 v1(11.43,3.95) ; C10.1 12.996,11.26 13.166,11.43 v1(13.26,11.43) 13.281,11.451 13.611,11.451 13.83,11.67 13.837,11.67 14.46,12.293 v1(14.46,13.49) ; v1(12.61,7.4) 15.37,10.16 v1(15.37,11.16) ; v1(13.64,5.39) 13.97,5.39 14.156,5.204 14.206,5.204 14.38,5.03 C15.1 ; v1(17.61,16.68) 17.89,16.96 C9.1 18.456,17.87 18.736,18.15 v1(18.83,18.15) ; v1(19.23,15.08) 19.324,15.08 19.594,15.35 C13.1 23.47,15.35 U3.2 ; R4.1 21.1,20.84 v1(21.14,20.8) ; v1(23.98,29.67) 22.77,29.67 21.051,27.951 21.051,27.481 IC1.2 20.98,26.21 IC1.33 17.984,26.706 17.984,27.406 IC1.8 15.09,27.41 14.25,28.25 C4.1 ; C3.1 24.33,25.53 v1(25.48,25.53) ; J3.5 24.55,5.33 v1(29.97,5.33) 29.75,5.55 C11.1 ; C1.1 25.73,25.874 25.48,25.624 v1(25.48,25.53) ; C5.1 26.25,38.121 26.339,38.21 v1(26.35,38.21) ; v1(27.07,21.6) 28.891,19.779 28.891,19.349 v1(28.94,19.3) 29.6,18.64 C19.1 32.65,18.64 U5.2 ; C14.1 28.58,15.02 v1(29.63,15.02) ; v1(28.8,23.3) 29.23,23.3 29.72,22.81 v1(31.01,22.81) ; v1(28.92,26.67) 28.63,26.38 28.08,26.38 ; v1@29.6,15.02 27.62,13.04 27.62,12.48 26.19,11.05 26.19,8.44 27.16,7.47 C11.1 ; C22.1 31.14,32.4 v1(31.14,34.47) 31.18,34.43 31.22,34.47 34.05,34.47 35.351,33.169 35.351,32.129 IC4.2 ; U2.2 32.65,7.47 C11.1 ; U4.2 33.01,25.01 C17.1 29.45,25.01 28.08,26.38 ; IC4.4 IC4.2 ; v1(35.99,22.5) 36.02,22.53 36.05,22.5 37.34,22.5 38.64,23.8 38.64,24.7 38.25,25.09 C18.1 ; C23.1 36.35,30.63 35.75,31.23 IC4.2 ; v1(36.45,18.49) 37.43,18.49 C20.1 ; C12.1 37.62,7.3 38.24,6.68 v1(38.24,6.6) ; v1(25.48,25.53) 26.25,25.53 26.776,26.056 26.876,26.056 27.1,26.28 C2.1 28.08,26.38
  Bottom Layer w0.152: v1(7.44,17.55) 8.37,16.62 v1(10.45,16.62) 10.48,16.65 17.58,16.65 v1(17.61,16.68) 19.21,15.08 v1(19.23,15.08) ; v1(9.3,7.79) 9.3,7.61 10.575,6.335 10.575,4.275 10.9,3.95 v1(11.43,3.95) 11.431,3.95 12.313,4.831 13.081,4.831 v1(13.64,5.39) 13.64,6.38 12.62,7.4 v1(12.61,7.4) ; v1(10.08,28.41) 10.08,24.44 v1(9.61,23.97) 10.65,23.97 v1(11.86,22.76) ; v1(12.57,16.12) 14.46,14.23 v1(14.46,13.49) ; v1(13.26,11.43) 13.53,11.16 v1(15.37,11.16) ; v1(18.83,18.15) 18.83,18.619 21.011,20.8 v1(21.14,20.8) ; v1(25.48,25.53) 23.98,27.03 v1(23.98,29.67) 25.24,29.67 30.02,34.45 ; v1(26.35,38.21) 28.87,38.21 30.02,37.06 30.02,34.45 ; v1(27.07,21.6) 28.11,21.6 28.81,22.3 28.81,23.29 v1(28.8,23.3) 28.86,23.36 28.86,26.61 v1(28.92,26.67) ; v1(28.94,19.3) 28.94,19.287 29.19,19.037 29.19,15.46 v1(29.63,15.02) ; v1(29.97,5.33) 31.55,3.75 35.51,3.75 38.24,6.48 v1(38.24,6.6) ; v1(31.01,22.81) 31.067,22.81 31.377,22.5 v1(35.99,22.5) 36.45,22.04 v1(36.45,18.49) ; v1(31.14,34.47) 31.12,34.45 30.02,34.45
NetC4_2: C4.2 IC1.5 | length 6
  Top Layer w0.152: C4.2 15.3,29.11 15.569,29.379 18.889,29.379 19.409,28.859 19.409,27.481 IC1.5
NetC8_2: C8.2 IC1.17 Y1.1 | length 9.7
  Top Layer w0.152: C8.2 10.44,18.88 10.614,19.054 10.664,19.054 10.74,19.13 Y1.1 13.62,19.13 14.555,20.065 14.555,21.025 15.92,22.39 17.906,22.39 17.98,22.464 IC1.17
NetC9_2: C9.2 IC1.18 Y1.2 | length 7
  Top Layer w0.152: C9.2 17.89,18.92 17.68,19.13 Y1.2 16.02,20.6 16.48,21.06 17.5,21.06 18.409,21.969 18.409,22.439 IC1.18
NetD1_1: D1.1 J1.2 R1.4 | length 5.9
  Top Layer w0.152: D1.1 18.37,31.87 18.64,31.6 R1.4 20.01,32.651 20.33,32.971 20.33,33.21 20.65,33.53 J1.2
NetD1_2: D1.2 J1.3 R1.3 | length 8.2
  Top Layer w0.152: D1.2 17.03,32.51 17.36,32.84 18.89,32.84 19.054,33.004 19.614,33.004 19.829,33.219 19.829,34.439 J1.3 ; R1.3 20.54,31.63 20.54,32.62 v1(20.99,33.07)
  Bottom Layer w0.152: v1(19.67,33.06) 19.68,33.07 v1(20.99,33.07)
NetD1_3: D1.3 J1.4 | length 4.9
  Top Layer w0.152: D1.3 16.54,31.88 16.54,32.523 17.377,33.36 19.004,33.36 19.35,33.706 J1.4
NetD1_6: D1.6 FB2.1 J1.1 | length 12.4
  Top Layer w0.152: D1.6 17.59,30.23 v1(18.5,30.23) ; v1(21.96,33.11) 21.3,33.77 J1.1 23.68,34.61 24.29,35.22 FB2.1
  Bottom Layer w0.152: v1(18.5,30.23) 18.51,30.23 19.74,31.46 21.5,31.46 21.96,31.92 v1(21.96,33.11)
NetFB1_1: FB1.1 J1.5 J1.6 J1.7 J1.8 J1.9 | length 15.1
  Top Layer w0.152: J1.5 18.7,34.796 18.576,34.92 FB1.1 14.77,36.03 16,37.26 J1.6 J1.9 J1.8 J1.7
NetIC1_3: IC1.3 R1.6 | length 2.9
  Top Layer w0.152: IC1.3 20.495,27.425 20.495,30.285 R1.6
NetIC1_4: IC1.4 R1.5 | length 2.9
  Top Layer w0.152: IC1.4 19.995,27.425 19.995,30.285 R1.5
NetIC1_16: IC1.16 IC2.1 R6.1 | length 18.5
  Top Layer w0.152: R6.1 7.78,13.265 8.004,13.041 IC2.1 IC2.1 9.95,13.87 9.319,14.501 9.319,19.379 10.659,20.719 11.35,21.41 13.4,21.41 15.2,23.21 IC1.16
NetIC1_19: IC1.19 J2.4 R3.1 R4.2 | length 18.7
  Top Layer w0.152: J2.4 7.17,24.6 v1(7.17,22.58) ; v1(18.15,20.4) 18.429,20.679 18.849,20.679 R4.2 ; IC1.19 18.98,20.87 R4.2 ; R3.1 19.015,19.895 19.015,20.835 R4.2
  Bottom Layer w0.152: v1(7.17,22.58) 7.17,20.82 7.59,20.4 v1(18.15,20.4)
NetIC1_20: IC1.20 IC2.3 R5.1 | length 24.6
  Top Layer w0.152: R5.1 8.56,11.62 8.98,12.04 IC2.3 9.95,10.86 10.87,9.94 12.61,9.94 21.669,18.999 21.669,21.019 21.319,21.369 19.831,21.369 19.48,21.72 IC1.20
NetIC1_21: IC1.21 U2.3 | length 26
  Top Layer w0.152: IC1.21 20.051,22.439 20.051,21.969 20.295,21.725 21.467,21.725 23.561,19.631 23.561,19.231 23.871,18.921 24.249,18.921 25.51,17.66 29.67,17.66 30.7,16.63 v1(30.7,10.89) ; v1(30.75,6.31) 30.844,6.31 31.044,6.51 U2.3
  Bottom Layer w0.152: v1(30.7,10.89) 30.75,10.84 v1(30.75,6.31)
NetIC1_24: IC1.24 IC3.6 | length 46.6
  Top Layer w0.152: v1(5.56,14.99) 5.57,14.99 6.62,16.04 v1(8.5,16.04) ; v1(10.16,15.57) 10.19,15.54 17.219,15.54 20.053,18.375 20.053,18.563 v1(20.12,18.63) ; IC3.6 12.309,5.441 12.609,5.441 14.14,3.91 v1(14.14,3.43) ; IC1.24 21.48,22.235 24.09,19.625 v1(24.09,19.45)
  Bottom Layer w0.152: v1(5.56,14.99) 5.56,8.269 5.649,8.18 7.88,8.18 10.04,6.02 10.04,4.17 10.96,3.25 13.96,3.25 v1(14.14,3.43) ; v1(8.5,16.04) 9.69,16.04 v1(10.16,15.57) ; v1(20.12,18.63) 23.27,18.63 v1(24.09,19.45)
NetIC1_25: IC1.25 U3.3 | length 14.1
  Top Layer w0.152: v1(21.805,14.385) 23.485,14.385 U3.3 ; IC1.25 22.455,23.21 22.529,23.136 22.529,22.801 v1(26,19.33)
  Bottom Layer w0.152: v1(21.805,14.385) 21.805,15.045 26,19.24 v1(26,19.33)
NetIC2_4: IC2.4 R9.1 U4.5 | length 33.9
  Top Layer w0.152: IC2.4 10.95,11.31 v1(11.24,11.02) ; v1(34.72,21.51) 34.72,22.49 R9.1 34.724,22.53 34.55,22.704 34.55,24.445 34.874,24.769 34.919,24.769 35.29,25.14 U4.5
  Bottom Layer w0.152: v1(11.24,11.02) 12.01,10.25 18.54,10.25 28.52,20.23 33.44,20.23 v1(34.72,21.51)
NetIC2_6: IC2.6 R10.1 U5.5 | length 31.8
  Top Layer w0.152: IC2.6 11.2,13.04 12.36,14.2 15.35,14.2 v1(15.38,14.23) ; v1(18.76,13.55) 21.7,10.61 v1(21.91,10.61) ; v1(31.71,13.49) 33.32,13.49 34.45,14.62 R10.1 34.424,15.73 34.251,15.904 34.251,18.136 34.561,18.446 34.856,18.446 U5.5
  Bottom Layer w0.152: v1(15.38,14.23) 18.01,14.23 18.69,13.55 v1(18.76,13.55) ; v1(21.91,10.61) 26.93,10.61 29.81,13.49 v1(31.71,13.49)
NetIC3_2: IC3.2 J3.2 U4.4 | length 57.6
  Top Layer w0.152: v1(9.03,4.39) 9.03,4.93 9.6,5.5 IC3.2 ; v1(16.35,2.73) 18.9,2.73 20.42,2.73 20.49,2.8 18.9,2.8 17.96,3.74 17.96,5.11 17.9,5.17 v1(17.96,5.23) ; J3.2@20.56,2.8 J3.2 ; v1(26.98,9.5) 31.18,9.5 32.36,10.68 36.17,10.68 37.19,11.7 v1(37.19,12.64) ; U4.4 36.42,24.19 37.15,23.46 v1(37.17,23.46)
  Bottom Layer w0.152: v1(9.03,4.39) 9.03,3.34 9.64,2.73 v1(16.35,2.73) ; v1(17.96,5.23) 17.893,5.297 17.758,5.297 17.74,5.315 17.74,7.46 19.78,9.5 v1(26.98,9.5) ; v1(37.17,23.46) 37.19,23.44 v1(37.19,12.64)
NetJ3_3: J3.3 U5.4 | length 21.6
  Top Layer w0.152: J3.3 26.68,4.16 26.69,4.17 v1(26.71,4.17) ; v1(32.89,11.98) 36.34,15.43 36.34,16.71 35.554,17.496 35.33,17.72 U5.4
  Bottom Layer w0.152: v1(26.71,4.17) 28.34,5.8 28.34,9.279 31.041,11.98 v1(32.89,11.98)
NetJ3_7: J3.7 U3.4 | length 8.2
  Top Layer w0.152: J3.7 24.45,9.83 25.94,11.32 U3.4
NetJ3_8: J3.8 U2.4 | length 25.8
  Top Layer w0.152: J3.8 21.47,6.7 22.39,5.78 22.39,1.97 22.67,1.69 35.49,1.69 36.73,2.93 36.73,5.9 36.12,6.51 U2.4
NetR7_1: R7.1 U2.5 | length 3.7
  Top Layer w0.152: R7.1 34.19,4.68 34.016,4.854 34.016,4.932 34.006,4.943 34.006,6.966 34.276,7.236 34.836,7.236 U2.5
NetR8_1: R8.1 U3.5 | length 3.5
  Top Layer w0.152: R8.1 25.1,14.735 25.421,15.056 25.716,15.056 U3.5
P3V3_SDA: C1.2 C2.2 C3.2 C10.2 C11.2 C13.2 C15.2 C17.2 C19.2 C21.2 C23.2 IC1.1 IC1.7 IC1.11 IC2.5 IC3.7 IC4.3 J2.1 R5.2 R6.2 R7.2 R8.2 R9.2 R10.2 R11.2 TP2.1 U2.1 U3.1 U4.1 U5.1 | length 170.7
  Top Layer w0.152: TP2.1 2.853,33.457 2.853,32.027 v1(2.92,31.96) ; R11.2 5.89,21.92 v1(5.89,21.15) ; R6.2 7.8,14.57 v1(8.79,14.57) ; R5.2 7.93,10.53 v1(8.82,10.53) ; v1(8.2,32.27) 8.2,31.18 C21.2 8.23,28.61 J2.1 ; IC2.5 12.1,12.54 12.33,12.31 C10.2 12.36,12.29 v1(13.44,12.29) ; IC3.7 14.36,6 C15.2 14.38,6.022 14.554,6.196 15.726,6.196 v1(15.73,6.2) ; v1(15.47,26.33) 16.095,25.705 17.275,25.705 IC1.11 ; v1(16.21,28.39) 16.23,28.37 16.25,28.39 18.21,28.39 18.48,28.12 IC1.7 ; v1(21.13,17.37) 21.13,16.44 C13.2 23.42,16.35 U3.1 23.79,16.23 24.161,15.859 24.206,15.859 24.369,15.696 24.369,12.579 24.324,12.534 24.324,12.484 24.15,12.31 R8.2 ; IC1.1 21.5,27.39 C3.2 25.556,27.39 25.73,27.564 C1.2 27.07,27.61 C2.2 27.16,27.52 v1(28.27,27.52) ; C11.2 32.6,8.47 U2.1@32.64,8.43 ; v1(30.11,20.87) 30.11,19.71 C19.2 32.66,19.64 U5.1 33.443,19.62 33.553,19.51 33.598,19.51 33.76,19.348 33.76,16.04 33.674,15.954 33.674,15.904 33.5,15.73 R10.2 32.36,15.73 31.55,14.92 v1(31.55,14.78) ; v1(30.81,27.2) 30.81,26.08 C17.2 33.31,26.01 33.39,26.09 33.761,25.719 33.806,25.719 34.18,25.345 34.18,22.95 33.984,22.754 33.984,22.704 33.81,22.53 R9.2 ; v1(32.64,9.76) U2.1@32.64,8.43 ; R7.2 33.29,4.68 33.464,4.854 33.464,4.904 33.65,5.09 33.65,7.715 33.326,8.039 33.281,8.039 32.91,8.41 U2.1 U2.1@32.64,8.43 ; v1(37.75,27.91) 37.79,27.91 38.05,28.17 C23.2 IC4.3
  Bottom Layer w0.152: v1(2.92,31.96) 2.9,31.94 2.9,29.99 ; v1(8.2,32.27) 8.16,32.23 5.14,32.23 2.9,29.99 ; v1@8.21,32.26 12.18,28.29 v1@16.11,28.29 ; v1(15.47,26.33) 15.47,27.65 v1@16.11,28.29 ; v1(15.73,6.2) 15.73,6.71 12.76,9.68 9.67,9.68 v1(8.82,10.53) 8.82,14.54 v1(8.79,14.57) ; v1(16.21,28.39) v1@16.11,28.29 ; v1(28.27,27.52) 28.59,27.2 v1(30.81,27.2) ; v1(31.55,14.78) 34.18,12.15 34.18,10.744 34.091,10.654 33.534,10.654 v1(32.64,9.76) ; v1(37.75,27.91) 31.52,27.91 v1(30.81,27.2) ; 2.9,29.99 2.9,22.53 4.28,21.15 v1(5.89,21.15) 5.89,17.47 v1(8.79,14.57) ; v1(8.79,14.57) 11.56,14.57 13.373,12.757 13.373,12.357 v1(13.44,12.29) 19.36,12.29 21.13,14.06 v1(21.13,17.37) 23.16,17.37 26.66,20.87 v1(30.11,20.87) 30.1,20.88 30.1,26.49 v1(30.81,27.2)
P5V_SDA: C5.2 C22.2 FB2.2 IC1.6 IC4.1 R3.2 TP1.1 | length 77.8
  Top Layer w0.152: TP1.1 8.27,38.75 v1(9.01,38.75) ; v1(18.67,28.85) 18.67,28.787 18.87,28.587 18.87,28.498 18.98,28.388 IC1.6 ; R3.2 20.03,19.9 v1(20.86,19.9) ; v1(25.58,33.67) 25.58,33.83 FB2.2@26.92,35.17 ; v1(27.97,38.75) 27.95,38.73 C5.2 27.95,35.77 27.824,35.644 27.294,35.644 26.92,35.27 FB2.2 FB2.2@26.92,35.17 ; v1(29.41,29.8) 30.19,29.8 C22.2@31.07,30.68 ; IC4.1 33.18,31.46 31.95,31.46 31.17,30.68 C22.2 C22.2@31.07,30.68 ; FB2.2@26.92,35.17 26.92,33.15 29.39,30.68 C22.2@31.07,30.68
  Bottom Layer w0.152: v1(9.01,38.75) v1(27.97,38.75) ; v1(18.67,28.85) 18.17,28.85 17.72,29.3 15.91,29.3 15.1,30.11 15.1,33.58 17.32,35.8 21.74,35.8 23.87,33.67 v1(25.58,33.67) ; v1(20.86,19.9) 22.6,19.9 26.34,23.64 26.34,28.52 27.62,29.8 v1(29.41,29.8)
SDA_SPI_SCK: IC1.26 U5.3 | length 13
  Top Layer w0.152: IC1.26 22.251,23.639 22.721,23.639 28.3,18.061 30.319,18.061 30.66,17.72 U5.3
SDA_SPI_SIN: IC1.28 IC3.5 | length 68.3
  Top Layer w0.152: IC3.5 12.3,4.95 12.3,4.17 v1(12.35,4.12) ; IC1.28 27.49,24.71 v1(27.91,25.13) ; v1(27.1,22.54) 27.66,22.54 28.801,21.399 32.178,21.399 32.596,20.981 38.011,20.981 v1(38.22,21.19) ; v1(36.47,9.43) 36.47,9.67 v1(38.12,11.32) ; v1(37.2,6.26) 38.02,5.44 v1(38.02,4.32)
  Bottom Layer w0.152: v1(12.35,4.12) 12.44,4.03 16.507,4.03 18.987,1.55 36.22,1.55 38.02,3.35 v1(38.02,4.32) ; v1(27.1,22.54) 27.12,22.56 27.12,24.34 v1(27.91,25.13) ; v1(36.47,9.43) 36.47,6.99 v1(37.2,6.26) ; v1(38.12,11.32) 38.22,11.42 v1(38.22,21.19)
SDA_SPI_SOUT: IC1.27 U4.3 | length 11
  Top Layer w0.152: IC1.27 33.12,24.21 U4.3
TCLK: IC1.12 J2.7 | length 14.9
  Top Layer w0.152: J2.7 4.59,27.03 4.93,26.69 14,26.69 15.48,25.21 IC1.12
TDI: IC1.13 J2.5 | length 15.8
  Top Layer w0.152: v1(5.82,30.39) 5.82,28.48 J2.5 ; v1(14.15,25.61) 15.05,24.71 IC1.13
  Bottom Layer w0.152: v1(5.82,30.39) 9.37,30.39 v1(14.15,25.61)
TDO: IC1.14 J2.6 | length 13.4
  Top Layer w0.152: J2.6 5.86,25.46 6.63,26.23 9.09,26.23 11.11,24.21 IC1.14
TGT_VCC: C12.2 C14.2 C16.2 C18.2 C20.2 IC3.8 J3.1 U2.6 U3.6 U4.6 U5.6 | length 85.1
  Top Layer w0.152: C16.2 11.43,7.73 11.604,7.556 11.604,7.506 11.7,7.41 IC3.8 ; C16.2@11.4,7.83 v1(11.4,8.94) ; J3.1 v1(27.12,2.89) ; U3.6 26.04,16.13 C14.2 28.49,16.11 v1(29.84,16.11) ; U2.6 35.12,8.35 C12.2 37.7,8.43 v1(38.91,8.43) ; U5.6 35.11,19.59 C20.2 37.59,19.65 v1(38.99,19.65) ; U4.6 C18.2 37.62,26.13 v1(39.02,26.13)
  Bottom Layer w0.152: v1(11.4,8.94) 12.1,8.94 18.99,2.05 26.28,2.05 v1(27.12,2.89) 35.4,2.89 38.92,6.41 38.92,8.42 v1(38.91,8.43) ; v1(29.84,16.11) 31.23,16.11 36.31,11.03 v1(38.91,8.43) ; v1(39.02,26.13) 39.02,19.68 v1(38.99,19.65) 38.95,19.61 38.95,8.47 v1(38.91,8.43)
TMS: IC1.15 J2.8 R11.1 | length 16.7
  Top Layer w0.152: J2.8 4.59,23.01 4.66,22.94 ; R11.1 4.82,22.78 4.66,22.94 ; IC1.15 11.29,23.71 9.25,21.67 7.17,21.67 5.9,22.94 4.66,22.94
pads on no net: D1.4 D1.5 D1.7 IC1.9 IC1.10 IC1.22 IC1.23 IC1.29 IC1.30 IC1.31 IC1.32 IC3.1 J3.4 J3.6 MH1.1 MH2.1 MH3.1 R1.1 R1.2 R1.7 R1.8

## Polygon pours and split planes (outlines as drawn)
GND on Top Layer "GND_L01_P-001" (solid, pour order 0): 0,40 40,40 40,0 0,0
GND on Bottom Layer "GND_L01_P-001" (solid, pour order 2): 0,40 40,40 40,0 0,0

## Silkscreen, mask and mechanical layers (free items; w line width, h text height)
Top Overlay:
  lines w0.127: 9.19,30.18 10.58,30.18 10.58,29.71 ; 9.62,28.99 9.26,28.99 9.26,29.22 9.67,29.22 9.67,29.455 9.2,29.455 9.2,29.905 10.125,29.905 10.58,29.905 10.58,29.71 ; 19.17,1.09 19.17,0.42 25.67,0.42 25.67,1.09 19.21,1.09 ; 9.67,29.71 9.67,30.1 10.125,30.1 10.125,29.71 10.58,29.71 ; 9.67,29.71 9.2,29.71 9.2,30.18 9.2,28.73 9.67,28.73 9.67,29.71 ; 9.67,29.71 10.58,29.71
  text "ग्रनैथ" at 0.97,4.926 h2
  text "Granite" at 6.972,0.499 h2
  text "v0.1" at 32.532,0.429 h2
Mechanical 1:
  the board outline again, w0.127